# Altium PCB Con_Mic_Module(no gain).PcbDoc
Units mil, origin at the board's own origin, x right, y up, seen from the top; angles counter-clockwise.
Board outline 725 x 475 mil, 2 copper layers (Top Layer, Bottom Layer); 11 components, 5 nets, 20 pads, 0 vias.
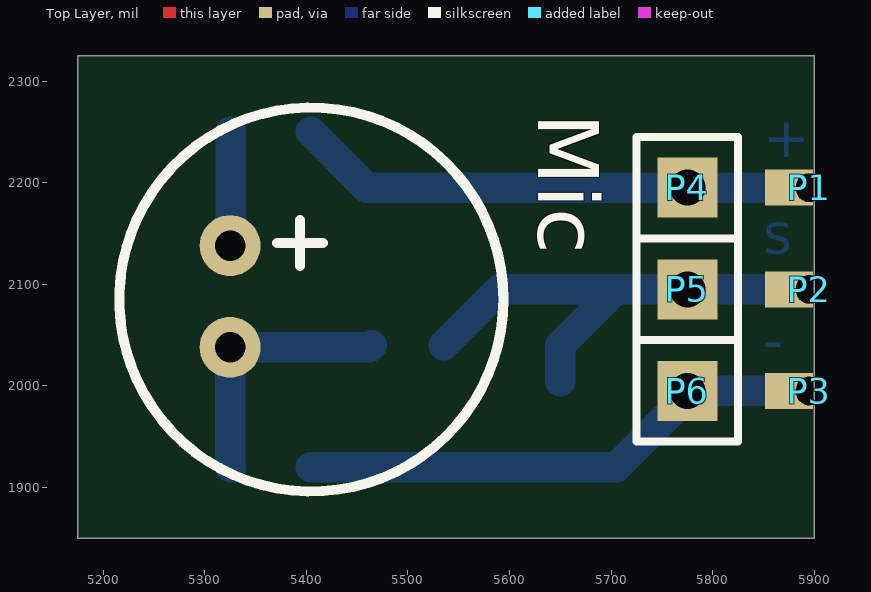
[diagram p0: Top Layer view]
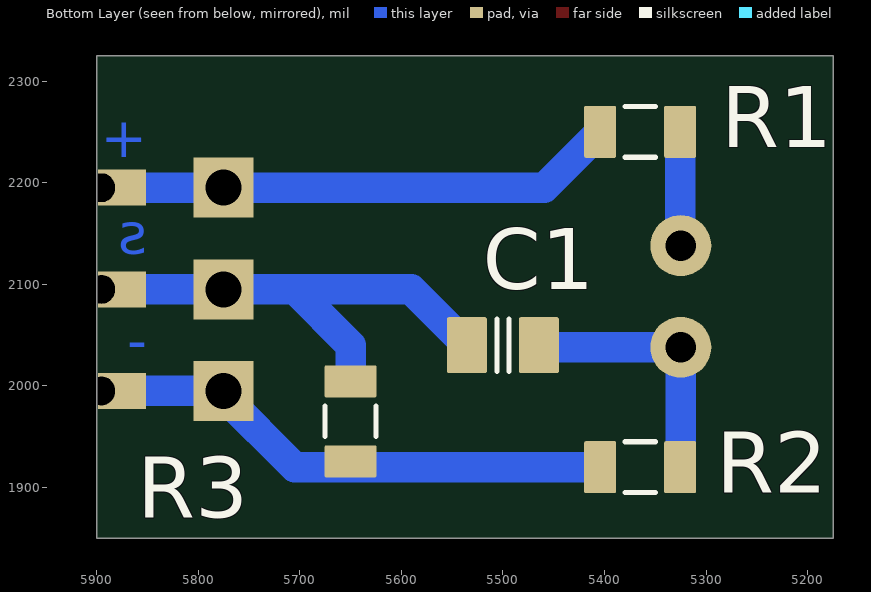
[diagram p1: Bottom Layer view, seen from below]
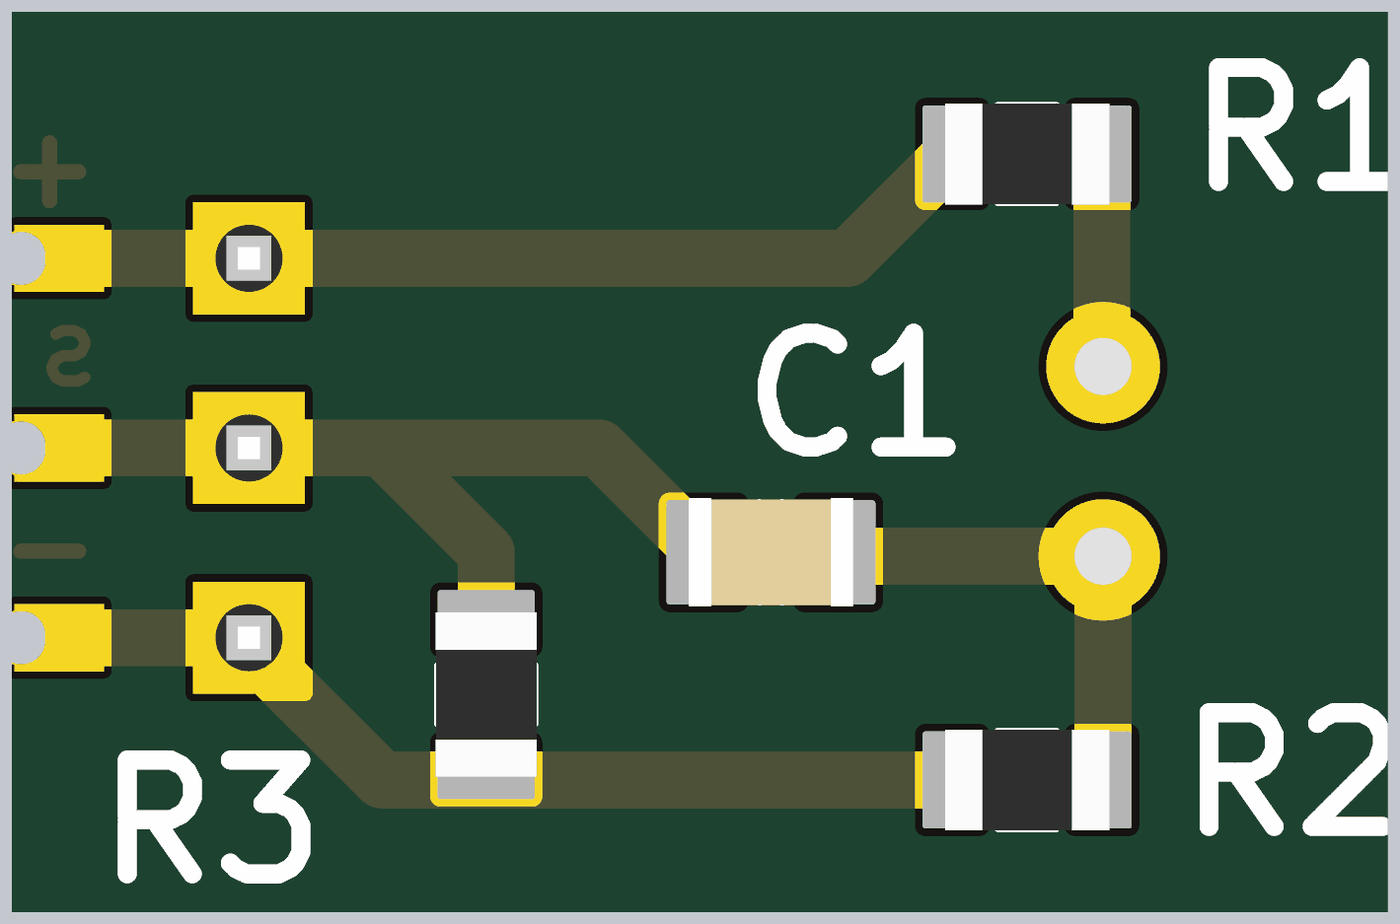
[diagram p2: 3D render of the assembled board from below, using the file's embedded part models]

## Layer stack, top to bottom
Top Layer: signal copper 1.4
Dielectric: dielectric 12.6, FR-4, Dk 4.8
Bottom Layer: signal copper 1.4

## Board outline
5175,2325 5175,1850 5900,1850 5900,2325

## Design rules (kind name [scope] priority, off if disabled: settings)
Clearance [All] p1: gap=10
ComponentClearance [All] p1 off: gap=10 collisioncheckmode=3 verticalgap=10 showdistances=FALSE
PolygonConnect [All] p1: connectstyle=Relief reliefconductorwidth=10 reliefentries=4 polygonreliefangle="90 Angle" airgapwidth=10
RoutingVias [All] p1: holewidth=28 width=50 viastyle="Through Hole" minholewidth=28 minwidth=50 maxholewidth=28 maxwidth=50
SolderMaskExpansion [All] p1: expansion=4
Width [All] p1: maxlimit=30 minlimit=10 preferedwidth=20 minimp=50.000000 maximp=50.000000 favimp=50.000000
27 further rules are at their usual default settings.

## Components (designator, comment, footprint, x,y, rotation, side; value= is the part's Value field where it differs from the comment)
C1 "Cap_0805" CAP_0805 5500,2040 r0 bottom
Mic "Mic" Con_Mic_9.6mm 5405,2085 r270 top
P1 "Pad1X1_1.27" Pad1X1_1.27 5895,2195 r180 top
P2 "Pad1X1_1.27" Pad1X1_1.27 5895,2095 r180 top
P3 "Pad1X1_1.27" Pad1X1_1.27 5895,1995 r180 top
P4 "HDR1X1_180_2.54" HDR1X1_180_2.54 5775,2195 r0 top
P5 "HDR1X1_180_2.54" HDR1X1_180_2.54 5775,2095 r0 top
P6 "HDR1X1_180_2.54" HDR1X1_180_2.54 5775,1995 r0 top
R1 "Res_0805" RES_0805 5365,2250 r0 bottom
R2 "Res_0805" RES_0805 5365,1920 r180 bottom
R3 "Res_0805" RES_0805 5650,1965 r90 bottom

## Footprints (in the part's own frame and the unit in brackets; to place one, negate y for a bottom-side part, rotate by r counter-clockwise, add the part's x,y. Pads: shape width x height; smd on the part's side, far side on the other; paste and mask are expansions set on the pad)
CAP_0805 [mm] "Chip Capacitor, Body 2.0x1.2mm, 0805, IPC Medium Density"
  round 0.254 on Mech14: 0(0,0)
  rrect10% 1x1.4 smd: 1(-0.9,0) 2(0.9,0)
  Top Layer pour cut-out: -0.4,0.8 0.4,0.8 0.4,-0.8 -0.4,-0.8
  silkscreen extent -0.15,-0.65 0.15,0.65, body extent -1.1,-0.72 1.1,0.73, height 1.34
Con_Mic_9.6mm [mil]
  round 60 hole 30: 1(-53,-80) 2(47,-80)
  silkscreen extent -189,-189 189,189, body extent -191,-190 191,192, height 264
HDR1X1_180_2.54 [mm] "Connector; Header; 2 Position"
  rect 1.5x1.5 hole 0.9: 1(0,0)
  silkscreen extent -1.27,-1.27 1.27,1.27, body extent -1.27,-1.27 1.27,1.27, height 7.58
Pad1X1_1.27 [mm] "Connector; Header; 2 Position"
  rect 1.2x0.9 hole 0.65 slot 0.711 at 90 deg copper offset 0.508,0: 1(0,0)
RES_0805 [mm] "Chip Resistor, Body 2.0x1.2mm, 0805, IPC Medium Density"
  round 0.254 on Mech14: 0(0,0)
  rrect10% 0.8x1.3 smd: 1(-1,0) 2(1,0)
  Top Layer pour cut-out: -0.6,0.75 0.6,0.75 0.6,-0.75 -0.6,-0.75
  silkscreen extent -0.38,-0.64 0.38,0.64, body extent -1.1,-0.67 1.1,0.68, height 0.69

## Part data
C1: "Capacitor"
Mic: library part Con_Mic_9.7mm, "Condenser Microphone"
P1 P2 P3 P4 P5 P6: "Header"
R1 R2 R3: "Resistor"

## Nets (pads, with @x,y where several pads share a name; then routed paths per layer and width w, separated by ;. In a path a pad name is that pad's centre, name@x,y a point inside that pad or via, vN(x,y) a via of type N, cw(c..) or ccw(c..) an arc to the next point about the centre after c; other vN are vias at no path point)
GND: P3.1 P6.1 R2.1 R3.1 | length 509.6
  Bottom Layer w30: R2.1 5705,1920 5775,1990 P6.1 P3.1@5880,1995
NetC1_1: C1.1 Mic.2 R2.2 | length 258.7
  Bottom Layer w30: R2.2 5325,1920.63 Mic.2 5462.57,2038 C1.1
NetMic_1: Mic.1 R1.1 | length 112.3
  Bottom Layer w30: Mic.1 5325.63,2138.63 R1.1
"SIGNAL OUT": C1.2 P2.1 P5.1 R3.2 | length 480.8
  Bottom Layer w30: C1.2 5590.43,2095 5705,2095 ; R3.2 5650,2040 5705,2095 ; P2.1@5880,2095 P5.1 5705,2095
VCC: P1.1 P4.1 R1.2 | length 503.4
  Bottom Layer w30: R1.2 5459.37,2195 P4.1 P1.1@5885,2195
pads on no net: C1.0 R1.0 R2.0 R3.0

## Other copper
Bottom Layer:
  text "+" at 5850,2225 h40
  text "s" at 5850,2130 h40
  text "-" at 5850,2025 h40

## Silkscreen, mask and mechanical layers (free items; w line width, h text height)
Mechanical 1:
  lines w10: 5900,1925 5900,1850 5175,1850 5175,2325 5900,2325 5900,2250